# Altium PCB PCB.PcbDoc
Units mm, origin at the board's own origin, x right, y up, seen from the top; angles counter-clockwise.
Board outline 50 x 50 mm, 2 copper layers (Top Layer, Bottom Layer); 9 components, 6 nets, 20 pads, 0 vias.
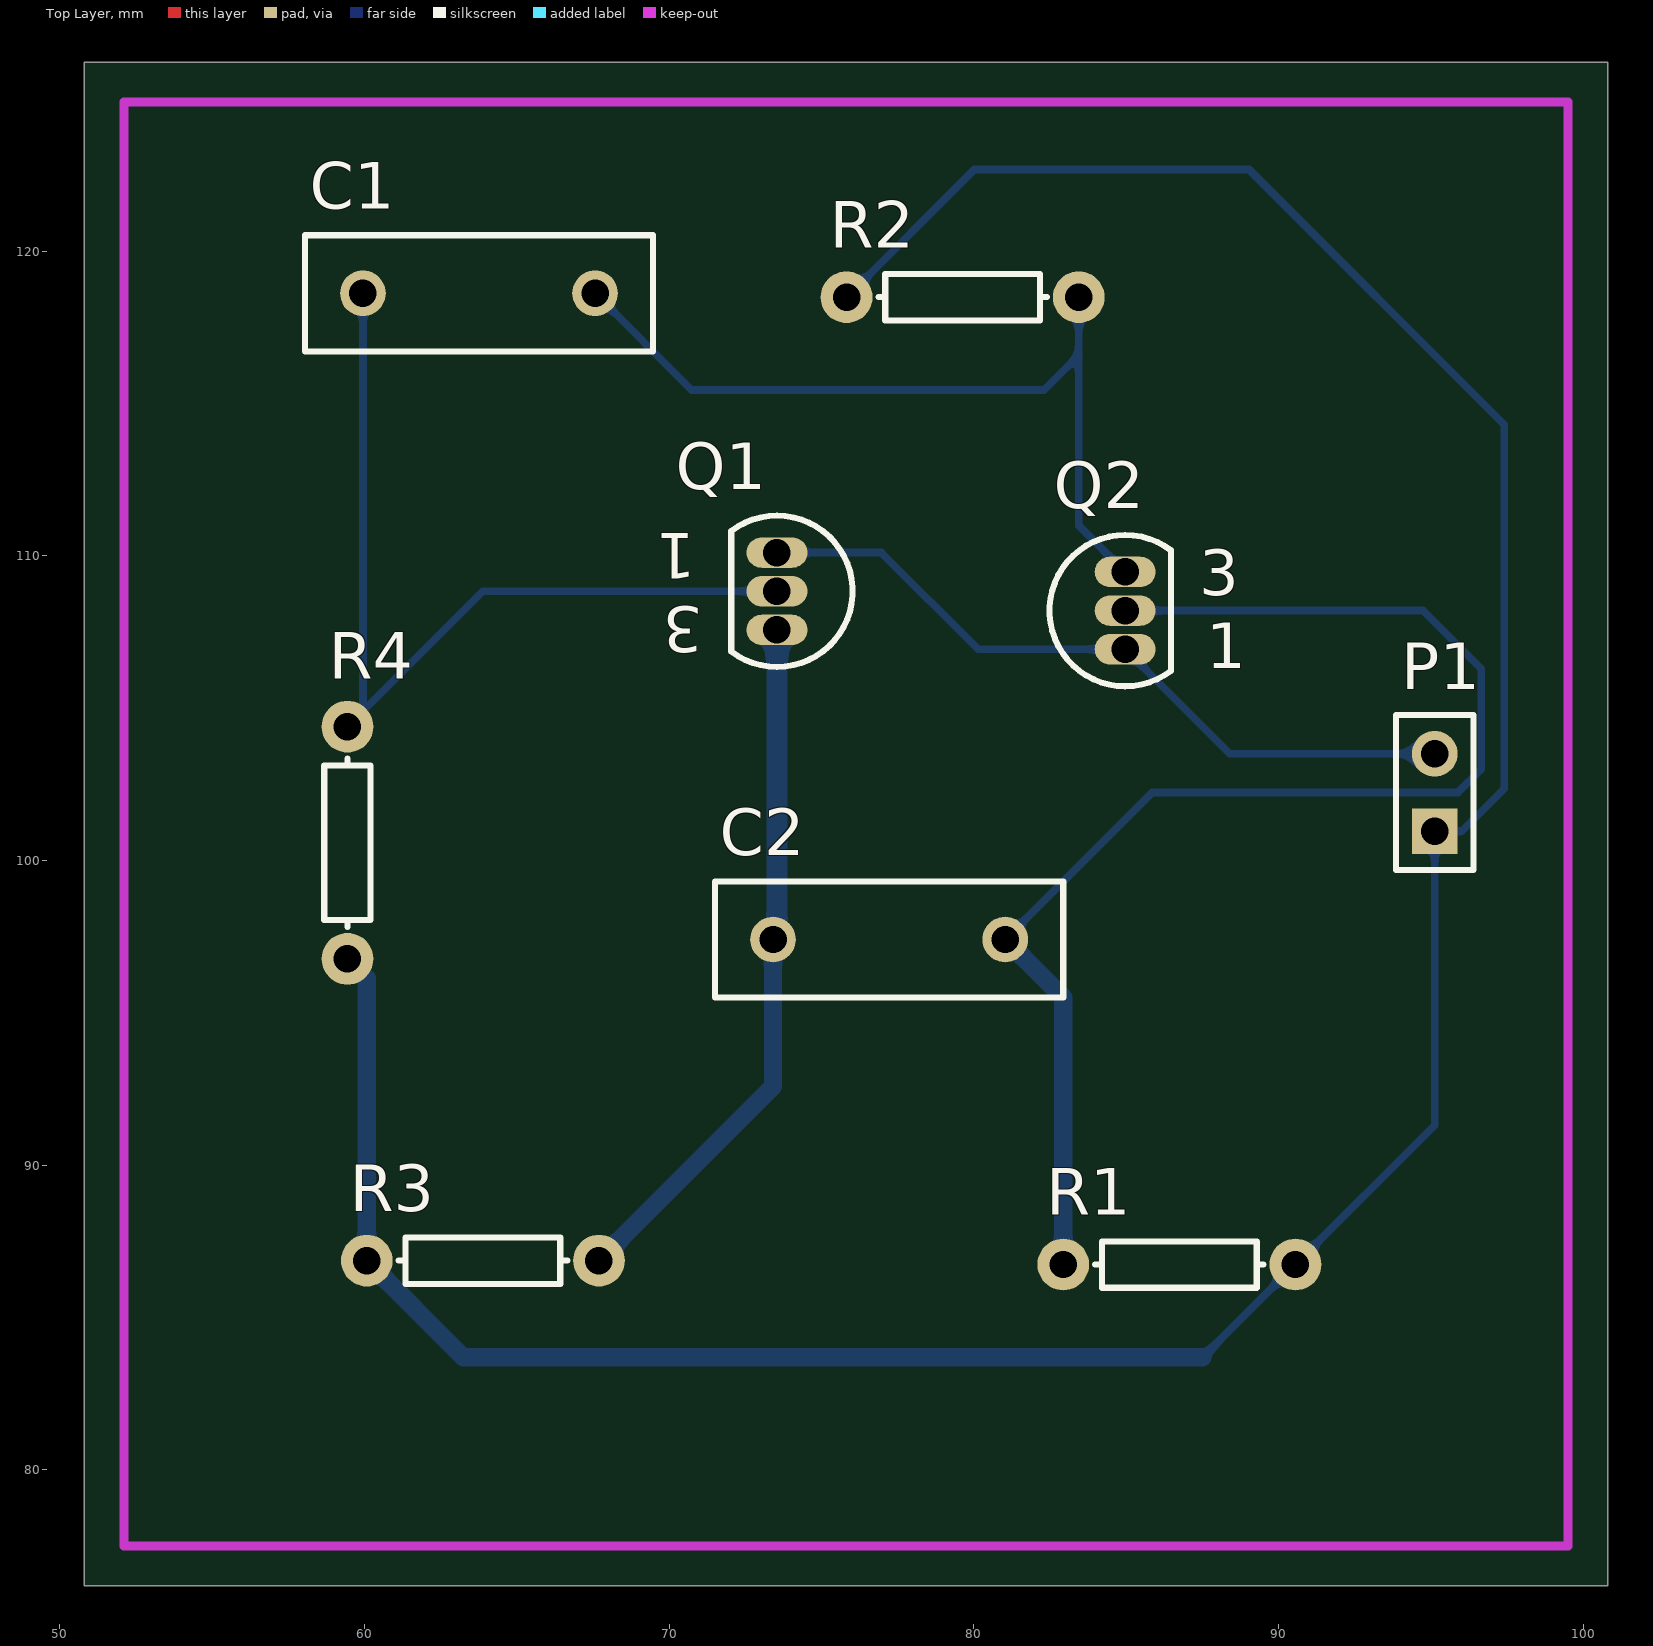
[diagram p0: Top Layer view]
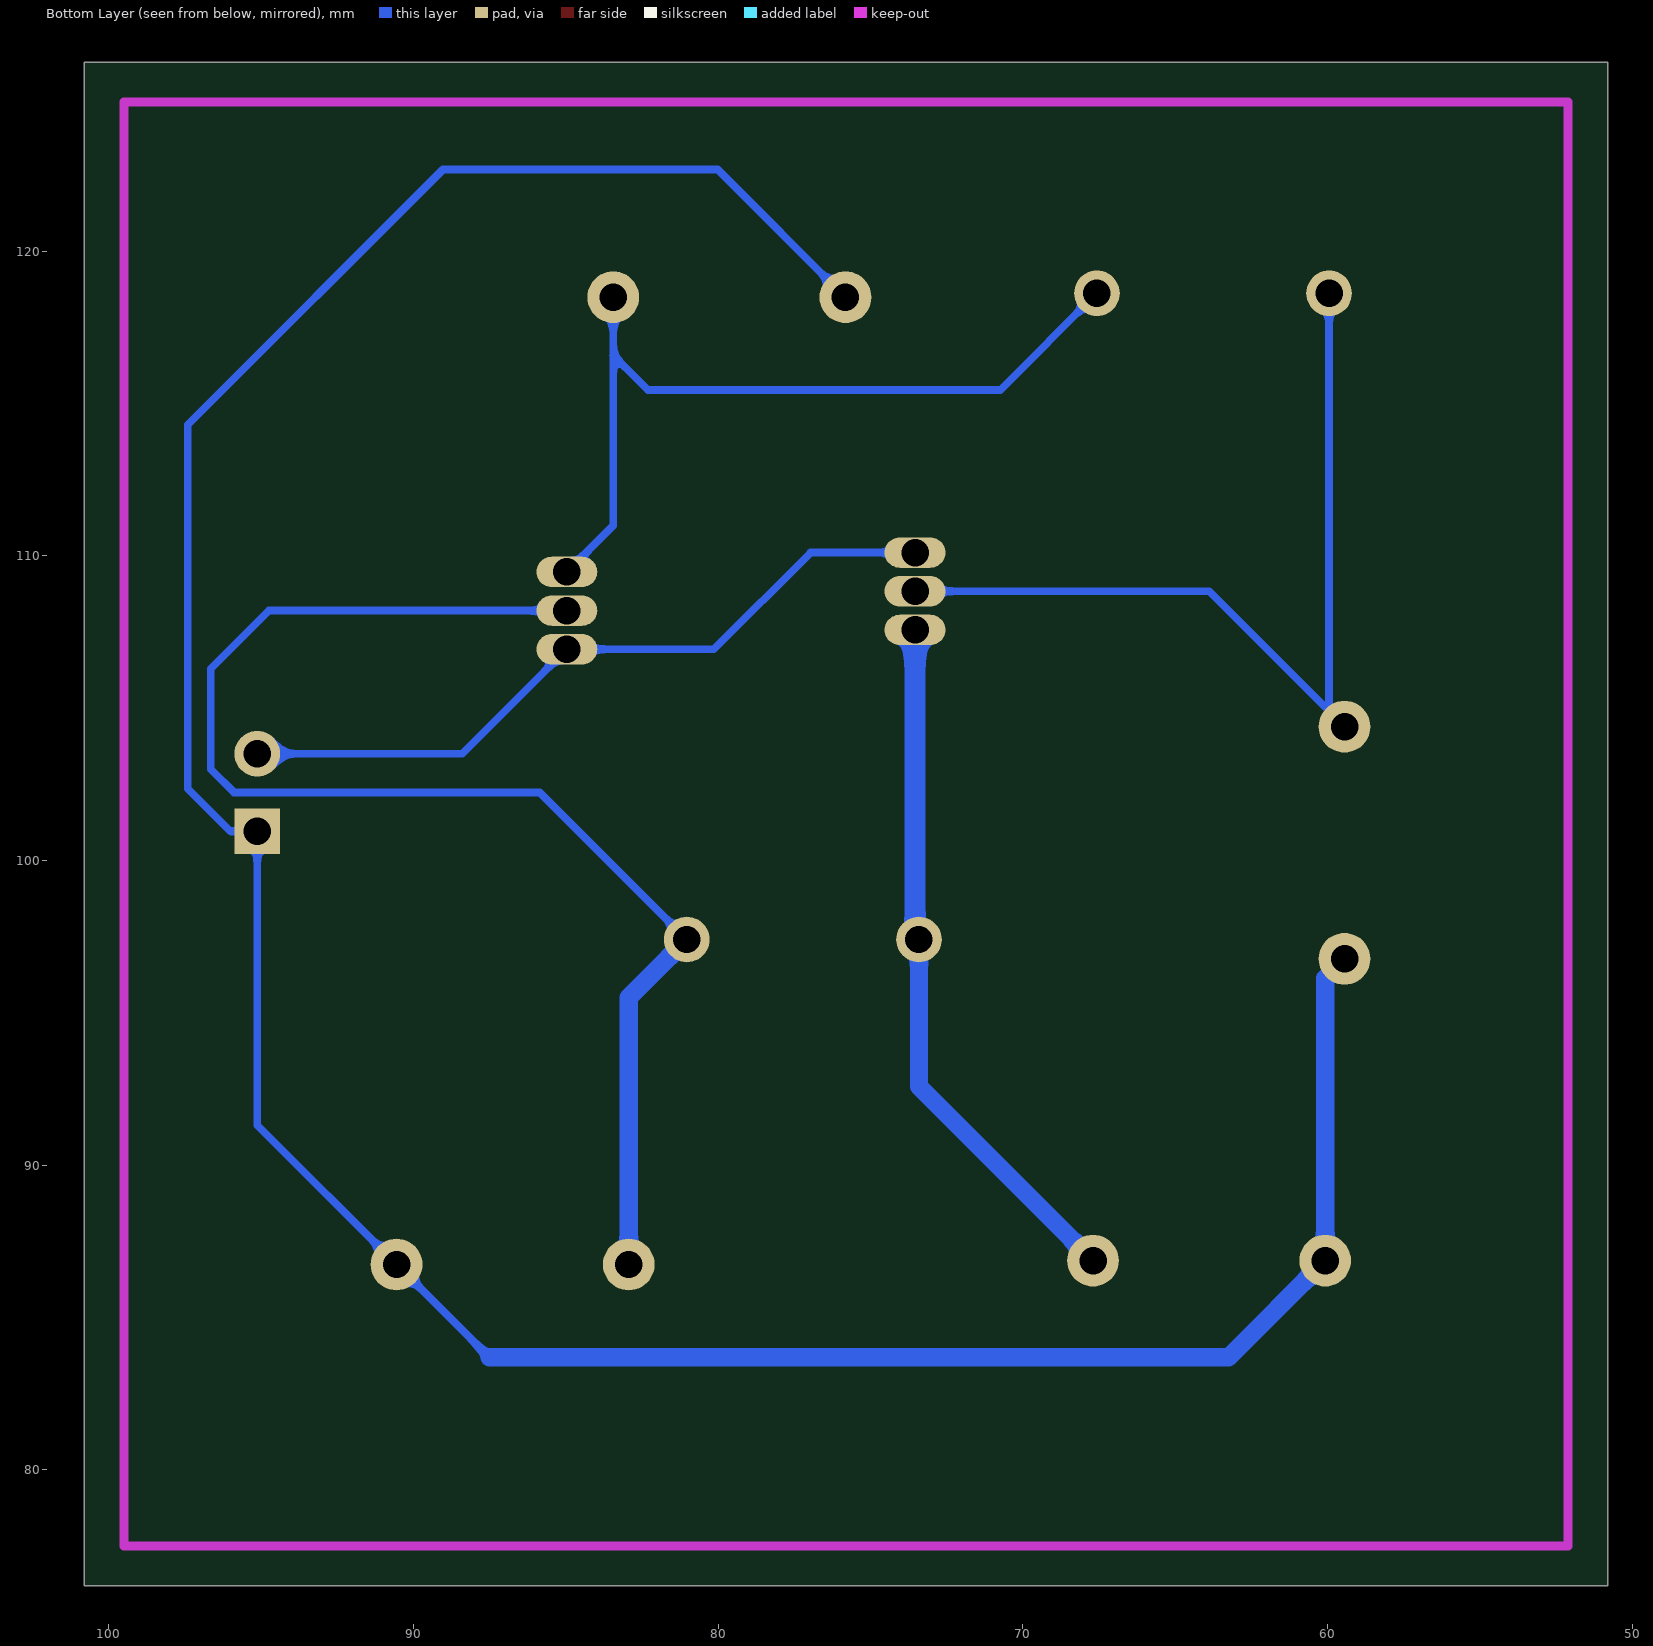
[diagram p1: Bottom Layer view, seen from below]

## Layer stack, top to bottom
Top Solder: solder mask 0.0102, Solder Resist, Dk 3.5
Top Layer: signal copper 0.0356
Dielectric 1: dielectric 0.32, FR-4, Dk 4.8
Bottom Layer: signal copper 0.0356
Bottom Solder: solder mask 0.0102, Solder Resist, Dk 3.5

## Board outline
50.8,76.2 100.8,76.2 100.8,126.2 50.8,126.2

## Design rules (kind name [scope] priority, off if disabled: settings)
Clearance [All] p1: gap=0.2
PolygonConnect [All] p1: connectstyle=Relief reliefconductorwidth=0.254 reliefentries=4 polygonreliefangle="90 Angle" airgapwidth=0.254
RoutingLayers [All] p1: top layer_v5=FALSE bottom layer_v5=TRUE
RoutingVias [All] p1: holewidth=0.8 width=1.6 viastyle="Through Hole" minholewidth=0.711 minwidth=1.27 maxholewidth=0.711 maxwidth=1.27
SolderMaskExpansion [All] p1: expansion=0.102
Width [All] p1: maxlimit=2 minlimit=0.2 preferedwidth=0.6
29 further rules are at their usual default settings.

## Components (designator, comment, footprint, x,y, rotation, side; value= is the part's Value field where it differs from the comment)
C1 "Cap" RAD-0.3 63.754,118.618 r180 top
C2 "Cap" RAD-0.3 77.216,97.409 r180 top
P1 "Header 2" HDR1X2 95.123,100.965 r90 top
Q1 "2N3904" TO-92A 73.533,108.839 r180 top
Q2 "2N3904" TO-92A 84.963,108.204 r0 top
R1 "Res1" AXIAL-0.3 86.741,86.741 r0 top
R2 "Res1" AXIAL-0.3 79.629,118.491 r180 top
R3 "Res1" AXIAL-0.3 63.881,86.868 r180 top
R4 "Res1" AXIAL-0.3 59.436,100.584 r270 top

## Footprints (in the part's own frame and the unit in brackets; to place one, negate y for a bottom-side part, rotate by r counter-clockwise, add the part's x,y. Pads: shape width x height; smd on the part's side, far side on the other; paste and mask are expansions set on the pad)
AXIAL-0.3 [mm] "Axial Device, Thru-Hole; 2 Leads; 0.3 in Pin Spacing"
  round 1.7 hole 0.9: 1(-3.81,0) 2(3.81,0)
  silkscreen extent -2.77,-0.76 2.77,0.76
HDR1X2 [mm] "Connector; Header; 2 Position"
  rect 1.5x1.5 hole 0.9: 1(0,0)
  round 1.5 hole 0.9: 2(2.54,0)
  silkscreen extent -1.27,-1.27 3.81,1.27
RAD-0.3 [mm] "Radial Cap, Thru-Hole; 2 Leads; 0.3 in Pin Spacing"
  round 1.5 hole 0.9: 1(-3.81,0) 2(3.81,0)
  silkscreen extent -5.71,-1.91 5.71,1.91
TO-92A [mm] "TO, Flat Index; 3 In-Line, Axial Leads; Body Dia. 4.5mm; Leads 0.51 x 0.48 mm (max)"
  oval 2x1 hole 0.9: 1(0,-1.27) 2(0,0) 3(0,1.27)
  silkscreen extent -2.48,-2.48 1.5,2.48

## Part data
C1 C2: "Capacitor"
P1: "Header, 2-Pin"
Q1 Q2: "NPN General Purpose Amplifier"
R1 R2 R3 R4: "Resistor"

## Nets (pads, with @x,y where several pads share a name; then routed paths per layer and width w, separated by ;. In a path a pad name is that pad's centre, name@x,y a point inside that pad or via, vN(x,y) a via of type N, cw(c..) or ccw(c..) an arc to the next point about the centre after c; other vN are vias at no path point)
GND: P1.2 Q1.1 Q2.1 | length 24.3
  Bottom Layer w0.254: Q1.1 76.962,110.109 80.137,106.934 Q2.1 88.392,103.505 P1.2
NetC1_1: C1.1 Q2.3 R2.1 | length 27.3
  Bottom Layer w0.254: C1.1 70.739,115.443 82.296,115.443 83.439,116.586 ; R2.1 83.439,116.586 ; Q2.3 83.439,110.998 83.439,116.586
NetC1_2: C1.2 Q1.2 R4.1 | length 29.7
  Bottom Layer w0.254: R4.1 R4.1@59.944,104.902 ; C1.2 R4.1@59.944,104.902 ; Q1.2 63.881,108.839 R4.1@59.944,104.902
NetC2_1: C2.1 Q2.2 R1.1 | length 45.2
  Bottom Layer w0.254: C2.1 85.852,102.235 95.885,102.235 96.647,102.997 96.647,106.299 94.742,108.204 Q2.2
  Bottom Layer w0.6: C2.1 82.931,95.504 R1.1
NetC2_2: C2.2 Q1.3 R3.1 | length 22.9
  Bottom Layer w0.6: R3.1 73.406,92.583 C2.2
  Bottom Layer w0.7: C2.2@73.533,97.536 Q1.3
NetP1_1: P1.1 R1.2 R2.2 R3.2 R4.2 | length 100.9
  Bottom Layer w0.254: R4.2 60.071,96.139 ; R2.2 80.01,122.682 89.027,122.682 97.409,114.3 97.409,102.362 96.012,100.965 P1.1 95.123,91.313 R1.2 87.503,83.693
  Bottom Layer w0.6: 60.071,96.139 R3.2 63.246,83.693 87.503,83.693

## Keep-outs
Keep-Out Layer:
  lines w0.3: 52.1,77.5 52.1,124.9 99.5,124.9 99.5,77.5 52.1,77.5

## Dimensions
52.1,77.5 to 52.1,124.9 on Mechanical 1
52.1,77.5 to 99.5,77.5 on Mechanical 1

## Text inside footprints (layer, text, board x,y; h text height)
Q1: Top Overlay "1" at 70.873,110.739 h1.5 r180; Top Overlay "3" at 71.103,108.329 h1.5 r180
Q2: Top Overlay "1" at 87.623,106.304 h1.5; Top Overlay "3" at 87.393,108.714 h1.5